# EAGLE board CT_schematic (EAGLE 7.6.0)

Size 100 x 80 mm. Coordinates in mm from the lower left corner, seen from the top.
Outline: 0,0 100,0 100,80 0,80 0,0
Copper layers (1*16): Top 0.035mm / dielectric 1.5mm / Bottom 0.035mm
Design rules "default": minimum track width 10mil, minimum drill 24mil, track to track 8mil, track to pad 8mil, pad to pad 8mil, via to via 8mil, smd to smd 8mil, copper to edge 40mil, drill to drill 8mil, minimum pad ring 10mil, minimum via ring 8mil, stop-mask expansion 4mil, vias tented up to drill 0mil, thermal gap 10mil

## Footprints (pad centres in the part's own frame; a part is rotated, then mirrored left to right if it is on the bottom)
C0603 = smd 0.8 x 0.8: 1 -0.762,0; 2 0.762,0
C0402 = smd 0.5 x 0.5: 1 -0.508,0; 2 0.508,0
C0805 = smd 1.2 x 1.3: 1 -1.016,0; 2 1.016,0
C1210 = smd 1.2 x 2.5: 1 -1.524,0; 2 1.524,0
EXV-9H = smd 3.505 x 1.676: 1 -2.857,0; 2 2.857,0
L0603 = smd 0.8 x 0.8: 1 -0.762,0; 2 0.762,0
L1210 = smd 1.2 x 2.5: 1 -1.524,0; 2 1.524,0
PJ-037B_PACKAGE = drill 3.7 square: 1 12,0 | drill 3.2 square: 2 6,0
R0603 = smd 0.8 x 0.8: 1 -0.762,0; 2 0.762,0
LQFP144 = smd 0.35 x 1.35: 1 -8.75,-10.625; 2 -8.25,-10.625; 3 -7.75,-10.625; 4 -7.25,-10.625; 5 -6.75,-10.625; 6 -6.25,-10.625; 7 -5.75,-10.625; 8 -5.25,-10.625; 9 -4.75,-10.625; 10 -4.25,-10.625; 11 -3.75,-10.625; 12 -3.25,-10.625; 13 -2.75,-10.62; 14 -2.25,-10.625; 15 -1.75,-10.625; 16 -1.25,-10.625; 17 -0.75,-10.625; 18 -0.25,-10.625; 19 0.25,-10.625; 20 0.75,-10.625; 21 1.25,-10.625; 22 1.75,-10.625; 23 2.25,-10.625; 24 2.75,-10.62; 25 3.25,-10.625; 26 3.75,-10.625; 27 4.25,-10.625; 28 4.75,-10.625; 29 5.25,-10.625; 30 5.75,-10.625; 31 6.25,-10.625; 32 6.75,-10.625; 33 7.25,-10.625; 34 7.75,-10.625; 35 8.25,-10.625; 36 8.75,-10.625; 73 8.75,10.625; 74 8.25,10.625; 75 7.75,10.625; 76 7.25,10.625; 77 6.75,10.625; 78 6.25,10.625; 79 5.75,10.625; 80 5.25,10.625; 81 4.75,10.625; 82 4.25,10.625; 83 3.75,10.625; 84 3.25,10.625; 85 2.75,10.625; 86 2.25,10.625; 87 1.75,10.625; 88 1.25,10.625; 89 0.75,10.625; 90 0.25,10.625; 91 -0.25,10.625; 92 -0.75,10.625; 93 -1.25,10.625; 94 -1.75,10.625; 95 -2.25,10.625; 96 -2.75,10.625; 97 -3.25,10.625; 98 -3.75,10.625; 99 -4.25,10.625; 100 -4.75,10.625; 101 -5.25,10.625; 102 -5.75,10.625; 103 -6.25,10.625; 104 -6.75,10.625; 105 -7.25,10.625; 106 -7.75,10.625; 107 -8.25,10.625; 108 -8.75,10.625 | smd 1.35 x 0.35: 37 10.625,-8.75; 38 10.625,-8.25; 39 10.625,-7.75; 40 10.625,-7.25; 41 10.625,-6.75; 42 10.625,-6.25; 43 10.625,-5.75; 44 10.625,-5.25; 45 10.625,-4.75; 46 10.625,-4.25; 47 10.625,-3.75; 48 10.625,-3.25; 49 10.625,-2.75; 50 10.625,-2.25; 51 10.625,-1.75; 52 10.625,-1.25; 53 10.625,-0.75; 54 10.625,-0.25; 55 10.625,0.25; 56 10.625,0.75; 57 10.625,1.25; 58 10.625,1.75; 59 10.625,2.25; 60 10.625,2.75; 61 10.625,3.25; 62 10.625,3.75; 63 10.625,4.25; 64 10.625,4.75; 65 10.625,5.25; 66 10.625,5.75; 67 10.625,6.25; 68 10.625,6.75; 69 10.625,7.25; 70 10.625,7.75; 71 10.625,8.25; 72 10.625,8.75; 109 -10.625,8.75; 110 -10.625,8.25; 111 -10.625,7.75; 112 -10.625,7.25; 113 -10.625,6.75; 114 -10.625,6.25; 115 -10.625,5.75; 116 -10.625,5.25; 117 -10.625,4.75; 118 -10.625,4.25; 119 -10.625,3.75; 120 -10.625,3.25; 121 -10.625,2.75; 122 -10.625,2.25; 123 -10.625,1.75; 124 -10.625,1.25; 125 -10.625,0.75; 126 -10.625,0.25; 127 -10.625,-0.25; 128 -10.625,-0.75; 129 -10.625,-1.25; 130 -10.625,-1.75; 131 -10.625,-2.25; 132 -10.625,-2.75; 133 -10.625,-3.25; 134 -10.625,-3.75; 135 -10.625,-4.25; 136 -10.625,-4.75; 137 -10.625,-5.25; 138 -10.625,-5.75; 139 -10.625,-6.25; 140 -10.625,-6.75; 141 -10.625,-7.25; 142 -10.625,-7.75; 143 -10.625,-8.25; 144 -10.625,-8.75
M10382 = smd 1 x 1: 1 0,0; 2 -1.6,0; 3 -3.2,0; 4 -3.2,-2; 5 -3.2,-3.6; 6 -3.2,-5.2; 7 -3.2,-6.8; 8 -3.2,-8.4; 9 -3.2,-10; 10 -3.2,-11.6; 11 -3.2,-13.2; 12 -3.2,-14.8; 13 -3.2,-16.4; 14 -3.2,-18; 15 -3.2,-19.6; 16 -3.2,-21.2; 17 -3.2,-22.8; 18 -0.55,-22.8; 19 1.05,-22.8; 20 2.65,-22.8; 21 5.3,-22.8; 22 5.3,-21.2; 23 5.3,-19.6; 24 5.3,-18; 25 5.3,-16.4; 26 5.3,-14.8; 27 5.3,-13.2; 28 5.3,-11.6; 29 5.3,-10; 30 5.3,-8.4; 31 5.3,-6.8; 32 5.3,-5.2; 33 5.3,-3.6; 34 5.3,-2; 35 5.3,0; 36 3.7,0
SSOP-20 = smd 1.651 x 0.432: 1 -3.48,2.925; 2 -3.48,2.275; 3 -3.48,1.625; 4 -3.48,0.975; 5 -3.48,0.325; 6 -3.48,-0.325; 7 -3.48,-0.975; 8 -3.48,-1.625; 9 -3.48,-2.275; 10 -3.48,-2.925; 11 3.48,-2.925; 12 3.48,-2.275; 13 3.48,-1.625; 14 3.48,-0.975; 15 3.48,-0.325; 16 3.48,0.325; 17 3.48,0.975; 18 3.48,1.625; 19 3.48,2.275; 20 3.48,2.925
182-009-MALE = drill 1.194 pad 1.524 octagon: 1 -5.537,10.923; 2 -2.769,10.923; 3 0,10.923; 4 2.769,10.923; 5 5.537,10.923; 6 -4.153,8.08; 7 -1.384,8.08; 8 1.384,8.08; 9 4.153,8.08 | hole 3.048: -12.446,9.501; 12.446,9.501
TDFN-8/6MM = smd 0.3 x 0.75: 1 0,0; 2 0.5,0; 3 1,0; 4 1.5,0; 5 1.5,3; 6 1,3; 7 0.5,3; 8 0,3
ABS07-32.768KHZ-7-T = smd 1.1 x 2.4: 1 -2.5,0; 2 0,0
ASFL1 = smd 1.7 x 1.5: 1 -1.27,-1.1; 2 1.27,-1.1; 3 1.27,1.1; 4 -1.27,1.1
WSON-8 = smd 0.3 x 0.6: 1 -0.75,0; 2 0.05,0; 3 0.85,0; 4 1.65,0; 5 1.65,3.8; 6 0.85,3.8; 7 0.05,3.8; 8 -0.75,3.8 | smd 3 x 2.6: PAD 0.45,1.9
SON-6 = smd 0.55 x 0.3: 1 -0.355,0.5 | smd 0.52 x 0.3: 2 -0.37,0; 3 -0.37,-0.5; 4 0.37,-0.5; 5 0.37,0; 6 0.37,0.5
SW_4-1437565-2 = smd 1.4 x 2.1: 1 -2.23,4.55; 2 -2.23,-4.55; 3 2.23,4.55; 4 2.23,-4.55
LGM67K-G1J2-24-Z = smd 0.8 x 1.4: A -2,0; C 0,0
NC7SZ125M5X = smd 1.3 x 0.7: 1 -1.3,0.95; 2 -1.3,0; 3 -1.3,-0.95; 4 1.3,-0.95; 5 1.3,0.95
DUMMY_PACKAGE_145 = drill 0.3: 1 0,-1; 2 1.5,-1; 3 3,-1

## Placement (x,y rotation side)
C1  1e-06  [C0603]  -43.18,77.47 0 top  (outside the outline)
C2  1e-07  [C0603]  -46.99,77.47 0 top  (outside the outline)
C3  1e-07  [C0603]  -50.8,77.47 0 top  (outside the outline)
C4  1e-07  [C0603]  -54.61,77.47 0 top  (outside the outline)
C5  1e-07  [C0603]  -58.42,77.47 0 top  (outside the outline)
C6  1e-07  [C0603]  -62.23,77.47 0 top  (outside the outline)
C7  1e-07  [C0603]  -66.04,77.47 0 top  (outside the outline)
C8  4.7e-06  [C0603]  -39.37,77.47 0 top  (outside the outline)
C9  1e-07  [C0603]  -69.85,77.47 0 top  (outside the outline)
C10  1e-07  [C0603]  -73.66,77.47 0 top  (outside the outline)
C11  1e-07  [C0603]  -15.24,82.55 0 top  (outside the outline)
C12  1e-07  [C0603]  -19.05,82.55 0 top  (outside the outline)
C13  1e-07  [C0603]  -22.86,82.55 0 top  (outside the outline)
C14  1e-07  [C0603]  -26.67,82.55 0 top  (outside the outline)
C15  1e-08  [C0603]  -30.48,82.55 0 top  (outside the outline)
C16  1e-08  [C0603]  -34.29,82.55 0 top  (outside the outline)
C17  1e-06  [C0603]  -38.1,82.55 0 top  (outside the outline)
C18  1e-11  [C0402]  -39.37,87.63 0 top  (outside the outline)
C19  1e-11  [C0402]  -43.18,87.63 0 top  (outside the outline)
C20  2.2e-11  [C0402]  -31.75,87.63 0 top  (outside the outline)
C21  2.2e-11  [C0402]  -35.56,87.63 0 top  (outside the outline)
C22  1e-06  [C0603]  -41.91,82.55 0 top  (outside the outline)
C23  1e-06  [C0603]  -45.72,82.55 0 top  (outside the outline)
C24  1e-06  [C0603]  -49.53,82.55 0 top  (outside the outline)
C25  4.7e-06  [C0805]  -53.34,71.12 0 top  (outside the outline)
C26  1e-08  [C0402]  -46.99,87.63 0 top  (outside the outline)
C27  1e-08  [C0402]  -50.8,87.63 0 top  (outside the outline)
C28  1e-08  [C0402]  -54.61,87.63 0 top  (outside the outline)
C29  1e-05  [C1210]  -29.21,71.12 0 top  (outside the outline)
C30  1e-05  [C1210]  -35.56,71.12 0 top  (outside the outline)
C31  1e-07  [C0402]  -58.42,87.63 0 top  (outside the outline)
C32  0.0001  [EXV-9H]  -35.56,63.5 0 top  (outside the outline)
C33  0.0001  [EXV-9H]  -46.99,63.5 0 top  (outside the outline)
C34  1e-08  [C0402]  -62.23,87.63 0 top  (outside the outline)
F1  240.0  [L0603]  -53.34,82.55 0 top  (outside the outline)
I1  1.5e-05  [L1210]  -41.91,71.12 0 top  (outside the outline)
J1  PJ-037B  [PJ-037B_PACKAGE]  -67.31,33.02 0 top  (outside the outline)
R2  1000.0  [R0603]  -57.15,82.55 0 top  (outside the outline)
R4  4700.0  [R0603]  -60.96,82.55 0 top  (outside the outline)
R5  2200.0  [R0603]  -64.77,82.55 0 top  (outside the outline)
R6  2200.0  [R0603]  -68.58,82.55 0 top  (outside the outline)
R7  2200.0  [R0603]  -72.39,82.55 0 top  (outside the outline)
R8  2200.0  [R0603]  -15.24,87.63 0 top  (outside the outline)
R9  10000.0  [R0603]  -25.4,77.47 0 top  (outside the outline)
R10  100000.0  [R0603]  -58.42,69.85 0 top  (outside the outline)
R11  100000.0  [R0603]  -63.5,69.85 0 top  (outside the outline)
R12  100000.0  [R0603]  -68.58,69.85 0 top  (outside the outline)
R13  100000.0  [R0603]  -73.66,69.85 0 top  (outside the outline)
R14  2231.0  [R0603]  -19.05,87.63 0 top  (outside the outline)
R15  1000.0  [R0603]  -22.86,87.63 0 top  (outside the outline)
R16  10000.0  [R0603]  -30.48,77.47 0 top  (outside the outline)
R17  10000.0  [R0603]  -35.56,77.47 0 top  (outside the outline)
R18  9100.0  [R0603]  -26.67,87.63 0 top  (outside the outline)
R19  680000.0  [R0603]  -15.24,77.47 0 top  (outside the outline)
R20  120000.0  [R0603]  -20.32,77.47 0 top  (outside the outline)
U1  stm32f100zdt7  [LQFP144]  -35.56,11.43 0 top  (outside the outline)
U2  M10382  [M10382]  -19.05,24.13 0 top  (outside the outline)
U3  MAX3218EAP+T  [SSOP-20]  -50.8,52.07 0 top  (outside the outline)
U4  182-009-113R531  [182-009-MALE]  -36.83,31.75 0 top  (outside the outline)
U5  24AA16-I/MC  [TDFN-8/6MM]  -41.91,52.07 0 top  (outside the outline)
U6  ABS07-32.768KHZ-7-T  [ABS07-32.768KHZ-7-T]  -68.58,63.5 0 top  (outside the outline)
U7  ASFL1-25MHZ-NCS  [ASFL1]  -26.67,63.5 0 top  (outside the outline)
U8  LP3878SDX-ADJ/NOPB  [WSON-8]  -73.66,50.8 0 top  (outside the outline)
U9  TPS3895ADRYR  [SON-6]  -71.12,86.36 0 top  (outside the outline)
U10  4-1437565-2  [SW_4-1437565-2]  -27.94,53.34 0 top  (outside the outline)
U11  Q65110A2395  [LGM67K-G1J2-24-Z]  -17.78,71.12 0 top  (outside the outline)
U12  nc7sz125m5x  [NC7SZ125M5X]  -46.99,69.85 0 top  (outside the outline)
U13  Dummy  [DUMMY_PACKAGE_145]  -68.58,87.63 0 top  (outside the outline)

## Library data of the parts
C1-C34 F1 I1 J1 R2 R4-R20 U1-U13 = circuit_tree

## Nets
CLK_CRYSTAL_U1_8: C18.1 U1.8 U6.1
CLK_CRYSTAL_U1_9: C19.1 U1.9 U6.2
CLK_U1_23: U1.23 U7.3
GND: C1.2 C2.2 C3.2 C4.2 C5.2 C6.2 C7.2 C8.2 C9.2 C10.2 C11.2 C12.2 C13.2 C14.2 C15.2 C16.2 C17.2 C18.2 C19.2 C20.2 C21.2 C22.2 C23.2 C24.2 C26.2 C27.2 C28.2 C29.2 C30.2 C31.2 C32.2 C33.2 C34.2 J1.2 R2.2 R9.2 R15.2 R18.2 R20.2 U1.16 U1.30 U1.31 U1.38 U1.51 U1.61 U1.71 U1.83 U1.94 U1.107 U1.120 U1.130 U1.143 U2.2 U2.4 U2.14 U2.17 U2.21 U2.24 U2.26 U2.28 U2.33 U2.34 U2.35 U2.36 U3.5 U3.17 U3.20 U4.5 U5.4 U7.2 U8.3 U8.PAD U9.2 U11.C U12.1 U12.3 U13.1
NET_U1_25: R4.1 U1.25 U12.4
NET_U1_33: C15.1 C16.1 C17.1 F1.1 U1.32 U1.33
NET_U1_69: R7.1 U1.69 U5.6
NET_U1_70: R8.1 U1.70 U5.5
NET_U1_136: R5.1 U1.136 U2.19
NET_U1_137: R6.1 U1.137 U2.18
NET_U1_138: R9.1 U1.138
NET_U1_141: U11.A
NET_U1_142: U10.3 U10.4
NET_U3_1: I1.1 U3.1
NET_U3_2: R10.1 U3.2
NET_U3_3: R11.1 U3.3
NET_U3_4: R12.1 U3.4
NET_U3_15: C24.1 U3.15
NET_U3_16: C25.2 U3.16
NET_U3_18: C25.1 U3.18
NET_U3_19: C23.1 U3.19
NET_U4_2: U3.12 U4.2
NET_U4_3: U3.14 U4.3
NET_U4_7: U3.11 U4.7
NET_U4_8: U3.13 U4.8
NET_U8_1: C28.1 U8.1
NET_U8_6: R14.2 R15.1 U8.6
NET_U8_8: R13.1 U8.8
NET_U9_1: R17.1 R18.1 U9.1
NET_U9_3: R19.2 R20.1 U9.3
NET_U9_4: R16.1 U9.4 U12.2
NET_U10_1: R2.1 U10.1 U10.2
PROC_ADC1_IN0: U1.34 U13.2
PROC_ADC1_IN1: U1.35 U13.3
PROC_UART4_RX: U1.112 U3.9
PROC_UART4_TX: U1.111 U3.7
VCC_S1_11V6: C29.1 C32.1 C33.1 J1.1 R13.2 U8.4
VCC_TIER1_3V3: C1.1 C2.1 C3.1 C4.1 C5.1 C6.1 C7.1 C8.1 C9.1 C10.1 C11.1 C12.1 C13.1 C14.1 C20.1 C21.1 C22.1 C26.1 C27.1 C30.1 C31.1 C34.1 F1.2 I1.2 R4.2 R5.2 R6.2 R7.2 R8.2 R10.2 R11.2 R12.2 R14.1 R16.2 R17.2 R19.1 U1.6 U1.17 U1.39 U1.52 U1.62 U1.72 U1.84 U1.95 U1.108 U1.121 U1.131 U1.144 U2.5 U2.25 U2.27 U3.6 U5.7 U5.8 U7.4 U8.5 U9.6 U12.5

## Tracks (layer width: path | path; a pad name or v marks a point on that pad's centre or on a via)
CLK_CRYSTAL_U1_8  (2 unrouted)
CLK_CRYSTAL_U1_9  (2 unrouted)
CLK_U1_23  (1 unrouted)
GND  (76 unrouted)
NET_U1_25  (2 unrouted)
NET_U1_33  (5 unrouted)
NET_U1_69  (2 unrouted)
NET_U1_70  (2 unrouted)
NET_U1_136  (2 unrouted)
NET_U1_137  (2 unrouted)
NET_U1_138  (1 unrouted)
NET_U1_142  (1 unrouted)
NET_U3_1  (1 unrouted)
NET_U3_2  (1 unrouted)
NET_U3_3  (1 unrouted)
NET_U3_4  (1 unrouted)
NET_U3_15  (1 unrouted)
NET_U3_16  (1 unrouted)
NET_U3_18  (1 unrouted)
NET_U3_19  (1 unrouted)
NET_U4_2  (1 unrouted)
NET_U4_3  (1 unrouted)
NET_U4_7  (1 unrouted)
NET_U4_8  (1 unrouted)
NET_U8_1  (1 unrouted)
NET_U8_6  (2 unrouted)
NET_U8_8  (1 unrouted)
NET_U9_1  (2 unrouted)
NET_U9_3  (2 unrouted)
NET_U9_4  (2 unrouted)
NET_U10_1  (2 unrouted)
PROC_ADC1_IN0  (1 unrouted)
PROC_ADC1_IN1  (1 unrouted)
PROC_UART4_RX  (1 unrouted)
PROC_UART4_TX  (1 unrouted)
VCC_S1_11V6  (5 unrouted)
VCC_TIER1_3V3  (57 unrouted)